# Altium PCB v1.4.PcbDoc
Units mil, origin at the board's own origin, x right, y up, seen from the top; angles counter-clockwise.
Board outline 2815 x 1660 mil, 2 copper layers (Top Layer, Bottom Layer); 43 components, 153 nets, 316 pads, 481 vias.
Unrouted connection lines stored in the file: 19.
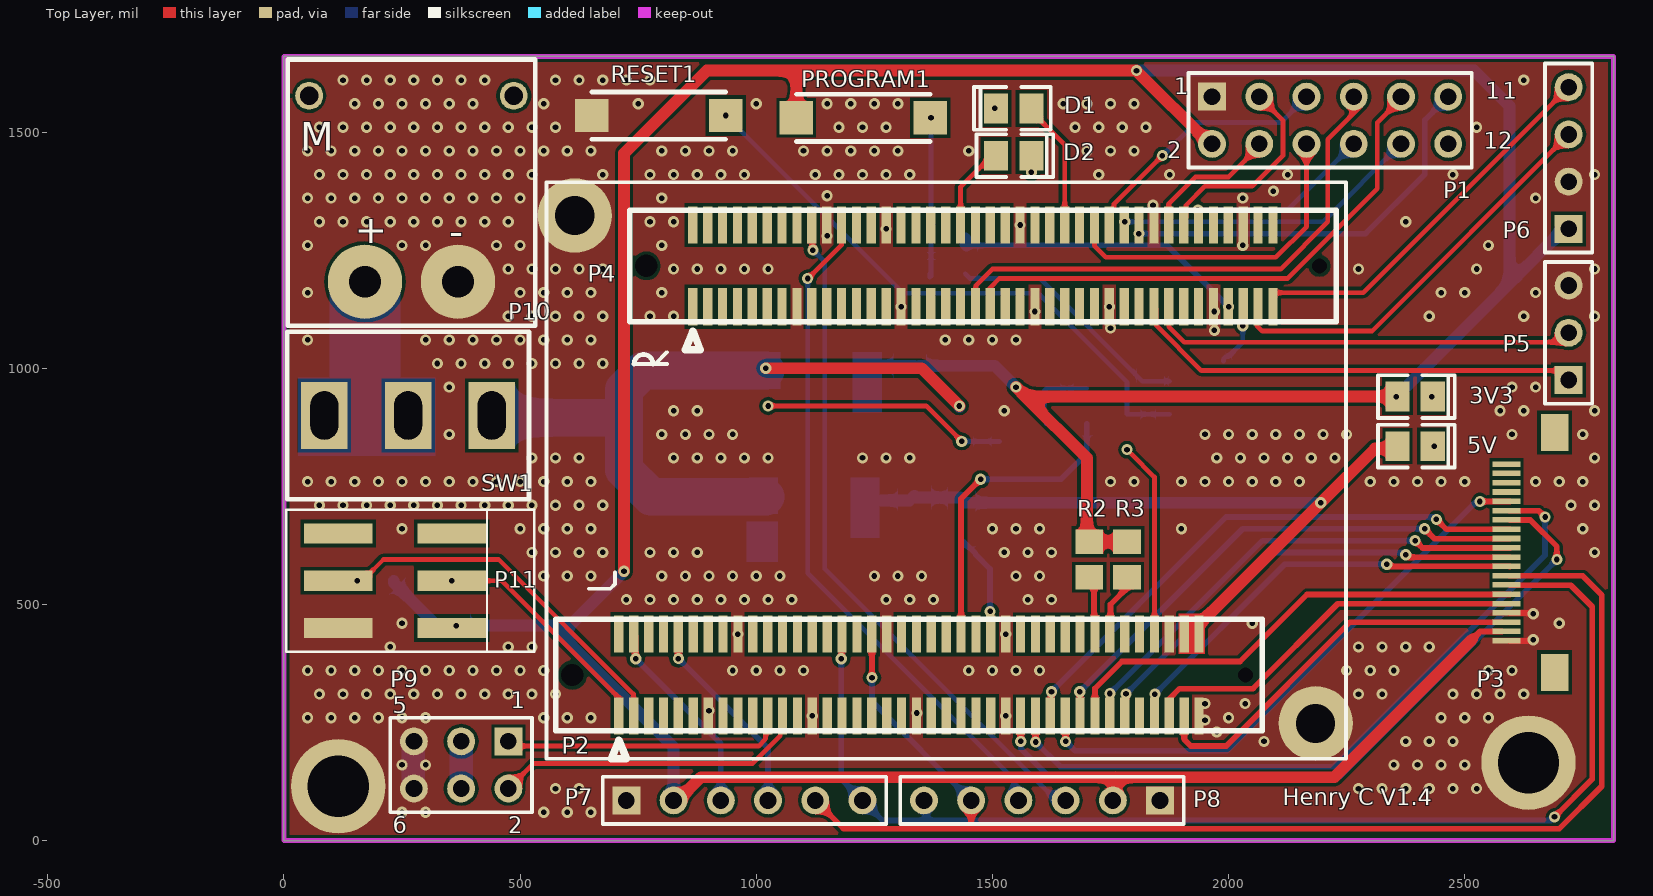
[diagram p0: Top Layer view]
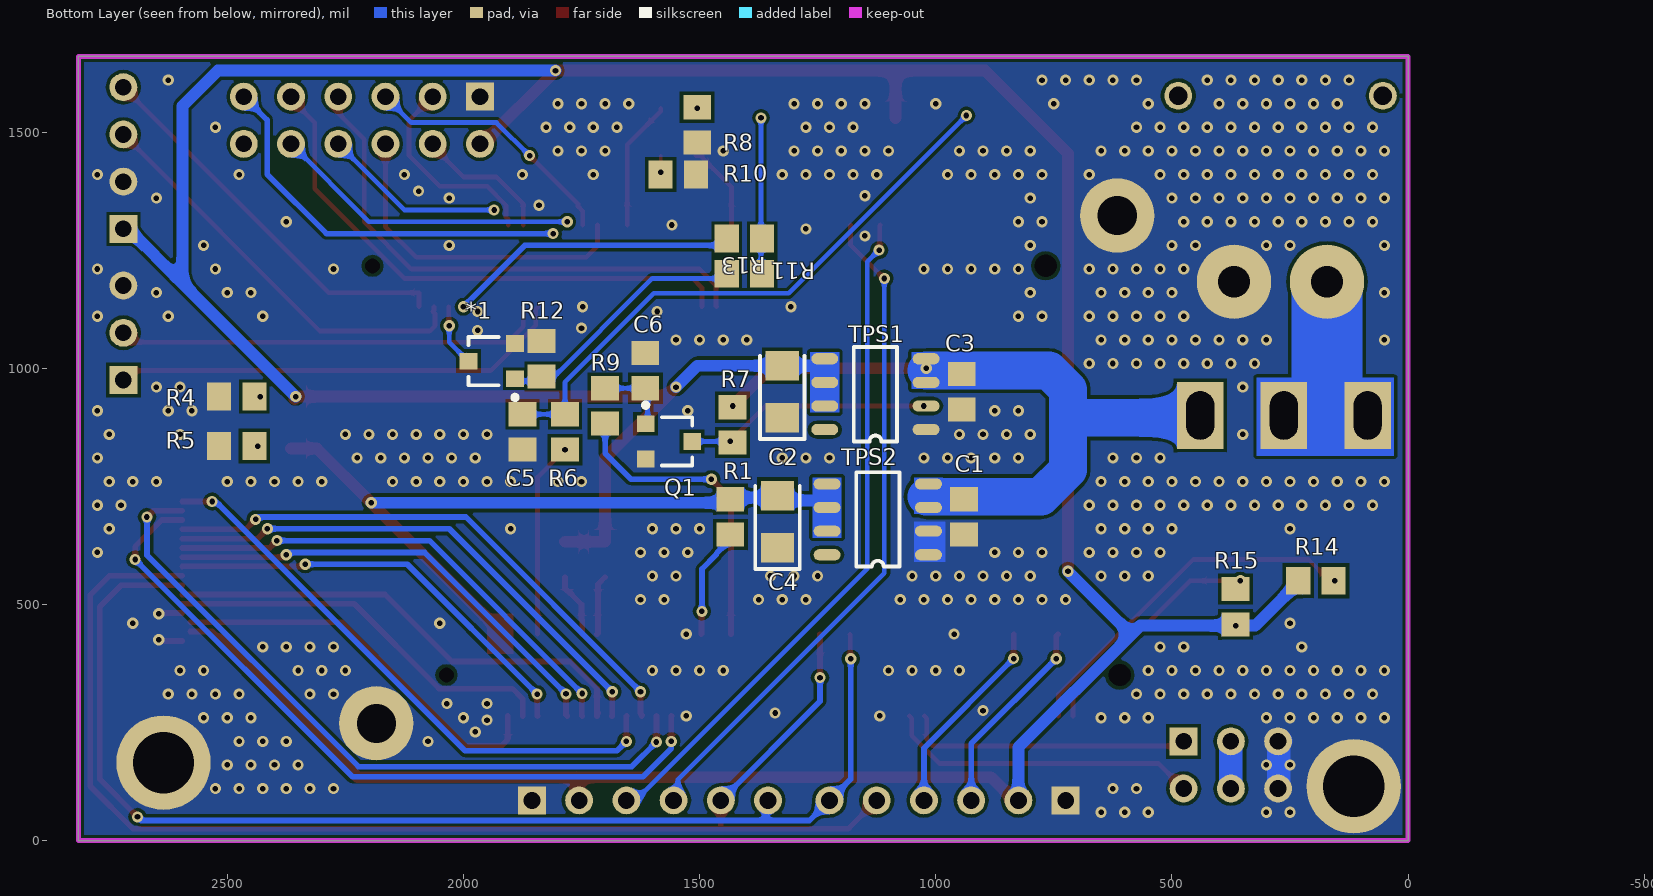
[diagram p1: Bottom Layer view, seen from below]
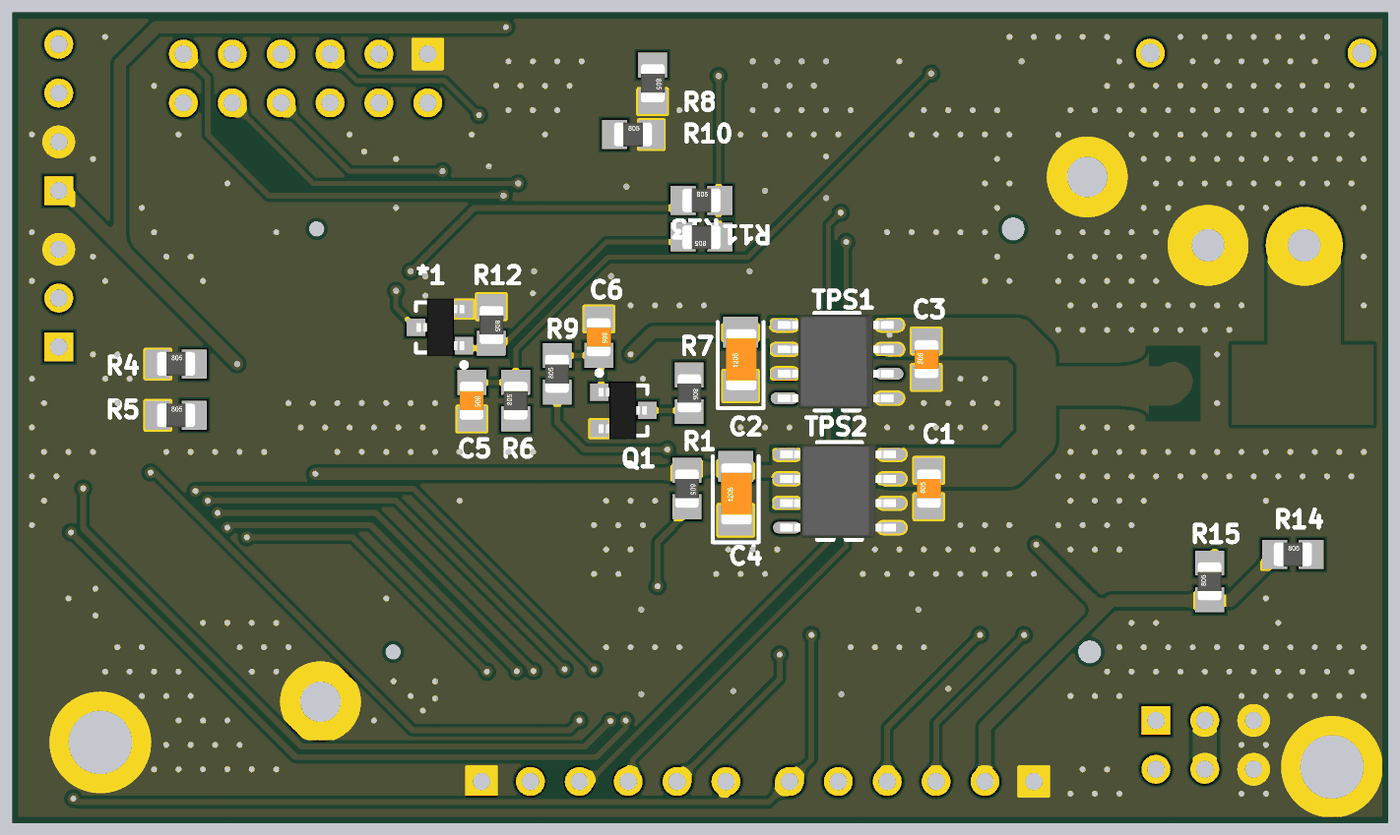
[diagram p2: 3D render of the assembled board from below, using the file's embedded part models]

## Layer stack, top to bottom
Top Solder: solder mask 0.4, Solder Resist, Dk 3.5
Top Layer: signal copper 1.4
Dielectric 1: dielectric 12.6, FR-4, Dk 4.8
Bottom Layer: signal copper 1.4
Bottom Solder: solder mask 0.4, Solder Resist, Dk 3.5

## Board outline
0,0 2815,0 2815,1660 0,1660

## Design rules (kind name [scope] priority, off if disabled: settings)
Clearance [All] p1: gap=7 ignorepadtopadclearanceinfootprint=FALSE
Height [All] p1: minheight=0 maxheight=2000 prefheight=1000
HoleSize [All] p1: absolutevalues=TRUE maxlimit=10000 minlimit=1 maxpercent=80.000 minpercent=20.000
MinimumSolderMaskSliver [All] p1: minsoldermaskwidth=5.91
PlaneConnect [All] p1: pad.planeconnectstyle=Relief pad.reliefexpansion=10 pad.reliefentries=4 pad.reliefconductorwidth=10 pad.reliefairgap=10 via.planeconnectstyle=Direct via.reliefexpansion=20 via.reliefentries=4 via.reliefconductorwidth=10 via.reliefairgap=10
PolygonConnect [All] p1: connectstyle=Direct reliefconductorwidth=10 reliefentries=4 polygonreliefangle="90 Angle" airgapwidth=10
RoutingVias [All] p1: holewidth=11.81 width=23.62 viastyle="Through Hole" minholewidth=11.81 minwidth=23.62 maxholewidth=10000 maxwidth=99999
SilkToSilkClearance [All] p1: silktosilkclearance=0
SilkToSolderMaskClearance [IsPad] p1: minsilkscreentomaskgap=5.91 clearancetoexposedcopper=TRUE
SolderMaskExpansion [All] p1: expansion=4 useseparateexpansions=TRUE expansionbottom=4
Width [All] p1: maxlimit=200 minlimit=6 preferedwidth=16
24 further rules are at their usual default settings.

## Classes and differential pairs
component class EVB1: 3V3 5V *1 C1 C2 C3 C4 C5 C6 D1 D2 P1 P2 P5 P6 P7 P8 P9 P10 PROGRAM1 Q1 R1 R2 R3 R4 R5 R6 R7 R8 R9 R10 R11 R12 R13 R14 R15 RESET1 SW1 TPS1 TPS2

## Components (designator, comment, footprint, x,y, rotation, side; value= is the part's Value field where it differs from the comment)
3V3 "LED" "LED 0805" 2395,940 r180 top (schematic designator 1)
5V "LED" "LED 0805" 2395,835 r180 top (schematic designator MCU1)
*1 "BC847B" SOT-23 1940,1015 r90 bottom
C1 "Cap Semi" CC2012-0805 940,685 r90 bottom value=100nF
C2 "Cap Semi" CC3216-1206 1325,950 r90 bottom value=220uF
C3 "Cap Semi" CC2012-0805 945,950 r90 bottom value=100nF
C4 "Cap Semi" CC3216-1206 1335,675 r90 bottom value=220uF
C5 "Cap Semi" CC2012-0805 1875,865 r270 bottom value=100nF
C6 "Cap Semi" CC2012-0805 1615,995 r270 bottom value=1uF
D1 "LED" "LED 0805" 1545,1550 r0 top
D2 "LED" "LED 0805" 1545,1450 r180 top
P1 "Header 6X2" HDR2X6 1965,1575 r0 top
P2 "LEFT" CON80 709.17,263.78 r180 top
P3 "Header 20" FPC0.5_20P 2720,610 r270 top
P4 "RIGHT" CON80 865.63,1130 r180 top
P5 "Header 3" HDR1X3 2720,975 r90 top
P6 "Header 4" HDR1X4 2720,1295 r90 top
P7 "Header 6" HDR1X6 725,85 r0 top
P8 "Header 6" HDR1X6 1855,85 r180 top
P9 "Header 3X2" HDR2X3 475,210 r180 top
P10 "Header 2" XT30PW-M 270,1380 r0 top
P11 "Header 3X2" "SMMD HEADER 2X3" 355,450 r270 top
PROGRAM1 "SW1" PUSHBUTTOM 1368.46,1530 r180 top
Q1 "BC847B" SOT-23 1565,845 r270 bottom
R1 "0R" CR2012-0805 1435,685 r270 bottom
R2 "4.7k" CR2012-0805 1705,595 r270 top
R3 "4.7k" CR2012-0805 1785,595 r270 top
R4 "Res" CR2012-0805 2480,940 r180 bottom value=6k2
R5 "Res" CR2012-0805 2480,835 r180 bottom value=6k2
R6 "Res" CR2012-0805 1785,865 r90 bottom value=1k
R7 "Res" CR2012-0805 1430,880 r270 bottom value=20k
R8 "Res" CR2012-0805 1505,1515 r270 bottom value=6k2
R9 "Res" CR2012-0805 1700,920 r90 bottom value=162k
R10 "Res" CR2012-0805 1545,1410 r180 bottom value=6k2
R11 "Res" CR2012-0805 1405,1200 r0 bottom value=10k
R12 "Res" CR2012-0805 1835,1020 r270 bottom value=10k
R13 "Res" CR2012-0805 1405,1275 r180 bottom value=1k
R14 "Res" CR2012-0805 195,550 r180 bottom value=10k
R15 "Res" CR2012-0805 365,495 r90 bottom value=10k
RESET1 "RESET" PUSHBUTTOM 651.54,1535 r0 top
SW1 "Toggle Switch" ToggleSwitch -386.77,1077.17 r270 top
TPS1 "TPS7333" TPS7333 1020.43,870 r0 bottom
TPS2 "TPS7350" TPS7333 1015.43,605 r0 bottom

## Footprints (in the part's own frame and the unit in brackets; to place one, negate y for a bottom-side part, rotate by r counter-clockwise, add the part's x,y. Pads: shape width x height; smd on the part's side, far side on the other; paste and mask are expansions set on the pad)
CC2012-0805 [mm] "Chip Capacitor; Body 2.0 x 1.2 mm (LxW typ)"
  rect 1.3x1.5 smd: 1(-0.95,0) 2(0.95,0)
  body extent -1,-0.63 1,0.61, height 0.78
CC3216-1206 [mm] "Chip Capacitor; Body 3.2 x 1.6 mm (LxW typ)"
  rect 1.6x1.8 smd: 1(-1.4,0) 2(1.4,0)
  silkscreen extent -2.54,-1.19 1.93,1.19, body extent -1.63,-0.84 1.57,0.76, height 1
CON80 [mm]
  rect 0.5x2 smd: 1(0,0) 2(0,-4.4) 3(-0.8,0) 4(-0.8,-4.4) 5(-1.6,0) 6(-1.6,-4.4) 7(-2.4,0) 8(-2.4,-4.4) 9(-3.2,0) 10(-3.2,-4.4) 11(-4,0) 12(-4,-4.4) 13(-4.8,0) 14(-4.8,-4.4) 15(-5.6,0) 16(-5.6,-4.4) 17(-6.4,0) 18(-6.4,-4.4) 19(-7.2,0) 20(-7.2,-4.4) 21(-8,0) 22(-8,-4.4) 23(-8.8,0) 24(-8.8,-4.4) 25(-9.6,0) 26(-9.6,-4.4) 27(-10.4,0) 28(-10.4,-4.4) 29(-11.2,0) 30(-11.2,-4.4) 31(-12,0) 32(-12,-4.4) 33(-12.8,0) 34(-12.8,-4.4) 35(-13.6,0) 36(-13.6,-4.4) 37(-14.4,0) 38(-14.4,-4.4) 39(-15.2,0) 40(-15.2,-4.4) 41(-16,0) 42(-16,-4.4) 43(-16.8,0) 44(-16.8,-4.4) 45(-17.6,0) 46(-17.6,-4.4) 47(-18.4,0) 48(-18.4,-4.4) 49(-19.2,0) 50(-19.2,-4.4) 51(-20,0) 52(-20,-4.4) 53(-20.8,0) 54(-20.8,-4.4) 55(-21.6,0) 56(-21.6,-4.4) 57(-22.4,0) 58(-22.4,-4.4) 59(-23.2,0) 60(-23.2,-4.4) 61(-24,0) 62(-24,-4.4) 63(-24.8,0) 64(-24.8,-4.4) 65(-25.6,0) 66(-25.6,-4.4) 67(-26.4,0) 68(-26.4,-4.4) 69(-27.2,0) 70(-27.2,-4.4) 71(-28,0) 72(-28,-4.4) 73(-28.8,0) 74(-28.8,-4.4) 75(-29.6,0) 76(-29.6,-4.4) 77(-30.4,0) 78(-30.4,-4.4) 79(-31.2,0) 80(-31.2,-4.4)
  round 0.5 hole 0.8 unplated: 81(-33.7,-2.2)
  round 1 hole 1.2 unplated: 82(2.5,-2.2)
  silkscreen extent -34.6,-5.2 3.4,2.3
CR2012-0805 [mm] "Chip Resistor; Body 2.0 x 1.3 mm (LxW typ)"
  rect 1.3x1.5 smd: 1(-0.95,0) 2(0.95,0)
  body extent -1,-0.61 1,0.63, height 0.78
FPC0.5_20P [mm] "0.5mm 20Pin FPC connector"
  rect 2x1.5 smd: 0(-6.45,-0.75) 0(6.45,-0.75)
  rect 0.3x1.5 smd: 1(4.75,-3.35) 2(4.25,-3.35) 3(3.75,-3.35) 4(3.25,-3.35) 5(2.75,-3.35) 6(2.25,-3.35) 7(1.75,-3.35) 8(1.25,-3.35) 9(0.75,-3.35) 10(0.25,-3.35) 11(-0.25,-3.35) 12(-0.75,-3.35) 13(-1.25,-3.35) 14(-1.75,-3.35) 15(-2.25,-3.35) 16(-2.75,-3.35) 17(-3.25,-3.35) 18(-3.75,-3.35) 19(-4.25,-3.35) 20(-4.75,-3.35)
HDR1X3 [mm] "Connector; Header; 3 Position"
  rect 1.5x1.5 hole 0.9: 1(0,0)
  round 1.5 hole 0.9: 2(2.54,0) 3(5.08,0)
  silkscreen extent -1.27,-1.27 6.35,1.27
HDR1X4 [mm] "Connector; Header; 4 Position"
  rect 1.5x1.5 hole 0.9: 1(0,0)
  round 1.5 hole 0.9: 2(2.54,0) 3(5.08,0) 4(7.62,0)
  silkscreen extent -1.27,-1.27 8.89,1.27
HDR1X6 [mm] "Connector; Header; 6 Position"
  rect 1.5x1.5 hole 0.9: 1(0,0)
  round 1.5 hole 0.9: 2(2.54,0) 3(5.08,0) 4(7.62,0) 5(10.16,0) 6(12.7,0)
  silkscreen extent -1.27,-1.27 13.97,1.27
HDR2X3 [mm] "Connector; Header; 2x3 Position"
  rect 1.5x1.5 hole 0.9: 1(-0.005,0)
  round 1.5 hole 0.9: 2(-0.005,2.54) 3(2.535,0) 4(2.535,2.54) 5(5.075,0) 6(5.075,2.54)
  silkscreen extent -1.27,-1.27 6.35,3.81
HDR2X6 [mm] "Connector; Header; 6x2 Position"
  rect 1.5x1.5 hole 0.9: 1(0,0)
  round 1.5 hole 0.9: 2(0,-2.54) 3(2.54,0) 4(2.54,-2.54) 5(5.08,0) 6(5.08,-2.54) 7(7.62,0) 8(7.62,-2.54) 9(10.16,0) 10(10.16,-2.54) 11(12.7,0) 12(12.7,-2.54)
  silkscreen extent -1.27,-3.81 13.97,1.27
"LED 0805" [mm] "0805 smd led"
  rect 1.3x1.6 smd: 1(0.95,0) 2(-0.95,0)
  silkscreen extent -2.13,-1.15 2,1.15, body extent -1.03,-0.53 1.03,0.38, height 0.85
PUSHBUTTOM [mm] "Normal size button"
  rect 1.8x1.8 smd: 1(7.2,0) 2(0,0)
  silkscreen extent 0,-1.27 7.2,1.27, body extent -1.57,-1.78 8.43,1.72, height 5
"SMMD HEADER 2X3" [mm]
  rect 1.1x3.68 smd: 1(0,-6.096) 2(0,0) 3(-2.54,-6.096) 4(-2.54,0) 5(-5.08,-6.096) 6(-5.08,0)
  silkscreen extent -6.35,-8.89 1.27,4.44
SOT-23 [mm]
  rect 0.9x0.95 smd: 1(-0.95,-1.25) 2(0.95,-1.25) 3(0,1.25)
  silkscreen extent -2.07,-1.37 1.3,1.25, body extent -1.5,-1.27 1.5,1.23, height 1.06
ToggleSwitch [mm] "Normal size toggle switch"
  rect 3.6x2.5 hole 1.5 slot 2.6 at 0 deg: 1(4.5,21) 2(4.5,16.5) 3(4.5,12)
  silkscreen extent 0,10 9,23, body extent 1.14,10.15 8,22.87, height 28.7
TPS7333 [mm]
  oval 1.45x0.6 smd: 1(0,0) 2(0,-1.27) 3(0,-2.54) 4(0,-3.81) 5(5.45,-3.81) 6(5.45,-2.54) 7(5.45,-1.27) 8(5.45,0)
  silkscreen extent 1.56,-4.44 3.89,0.64, body extent -0.22,-4.36 5.81,0.55, height 1.63
XT30PW-M [mm]
  round 1.5 hole 1: 0(-5.5,5) 0(5.5,5)
  round 4 hole 1.7: 1(-2.5,-5) 2(2.5,-5)
  silkscreen extent -6.65,-7.37 6.65,6.95

## Part data
3V3 5V D1 D2: "Typical GaAs LED", LatestRevisionDate=08-Jul-2005, LatestRevisionNote="Mech Layer 1 removed.", PackageReference=LED-1, Published=8-Jun-2000, Publisher="Altium Limited"
*1 Q1: "NPN"
C1 C2 C3 C4 C5 C6: "Capacitor (Semiconductor SIM Model)", LatestRevisionDate=17-Jul-2002, LatestRevisionNote="Re-released for DXP Platform.", PackageReference=C1206, Published=8-Jun-2000, Publisher="Altium Limited"
P1: "Header, 6-Pin, Dual row", LatestRevisionDate=17-Jul-2002, LatestRevisionNote="Re-released for DXP Platform.", Publisher="Altium Limited"
P2: library part Header40X2_left, "Header, 30-Pin, Dual row", LatestRevisionDate=17-Jul-2002, LatestRevisionNote="Re-released for DXP Platform.", Publisher="Altium Limited"
P3: "Header, 20-Pin", LatestRevisionDate=17-Jul-2002, LatestRevisionNote="Re-released for DXP Platform.", Publisher="Altium Limited"
P4: library part Header40X2_right, "Header, 30-Pin, Dual row", LatestRevisionDate=17-Jul-2002, LatestRevisionNote="Re-released for DXP Platform.", Publisher="Altium Limited"
P5: "Header, 3-Pin", LatestRevisionDate=17-Jul-2002, LatestRevisionNote="Re-released for DXP Platform.", Publisher="Altium Limited"
P6: "Header, 4-Pin", LatestRevisionDate=17-Jul-2002, LatestRevisionNote="Re-released for DXP Platform.", Publisher="Altium Limited"
P7 P8: "Header, 6-Pin", LatestRevisionDate=17-Jul-2002, LatestRevisionNote="Re-released for DXP Platform.", Publisher="Altium Limited"
P9 P11: "Header, 3-Pin, Dual row", LatestRevisionDate=17-Jul-2002, LatestRevisionNote="Re-released for DXP Platform.", Publisher="Altium Limited"
P10: "Header, 2-Pin", LatestRevisionDate=17-Jul-2002, LatestRevisionNote="Re-released for DXP Platform.", Publisher="Altium Limited"
PROGRAM1 RESET1: library part SW-SPST, "Single-Pole, Single-Throw Switch", Published=24-Mar-1999, Publisher="Altium Limited", Revision="July-2002: Re-released for DXP Platform."
R1 R2 R3: library part Res, "Resistor", LatestRevisionDate=4-Mar-2005, LatestRevisionNote="PCB Footprint replaced.", Published=8-Jun-2000, Publisher="Altium Limited"
R4 R5 R6 R7 R8 R9 R10 R11 R12 R13 R14 R15: "Resistor", LatestRevisionDate=4-Mar-2005, LatestRevisionNote="PCB Footprint replaced.", Published=8-Jun-2000, Publisher="Altium Limited"
SW1: library part ToggleSwitch, "Power toggle switch"
TPS2: library part TPS7333

## Free pads (board coordinates)
  round 157.48 hole 82.68: 1(615.74,1323.19) 1(2184.48,248.23)
  round 200 hole 129.92: 8(115,115) 8(2635,165)

## Via types
v1: diameter 23.62, hole 11.81, Top Layer to Bottom Layer, tented both sides, 481 vias

## Nets (pads, with @x,y where several pads share a name; then routed paths per layer and width w, separated by ;. In a path a pad name is that pad's centre, name@x,y a point inside that pad or via, vN(x,y) a via of type N, cw(c..) or ccw(c..) an arc to the next point about the centre after c; other vN are vias at no path point)
3V3: 3V3.1 C2.2 P1.2 P3.2 P6.1 P7.2 P8.2 P11.2 PROGRAM1.1 R2.1 R3.1 R14.1 R15.1 TPS1.5 TPS1.6 TPS1.7 | length 8689.1
  Top Layer w12: 2515,425 2532.58,442.58 2578.02,442.58 P3.2@2578.11,442.68
  Top Layer w25: v1(720,570) 720,1455 895,1630 1085,1630 ; P7.2 833.86,85 882.89,134.03 1760,134.03 ; PROGRAM1.1 1085,1630 ; v1(1550,960) 1570,940 ; P8.2 1750,85 1760,95 1760,134.03 ; R3.1 R2.1 1700,632.4 1700,810 1570,940 ; P1.2 1960,1475 v1(1805,1630) 1085,1630 ; v1(2355,940) 2355,939.65 3V3.1@2357.6,937.05 ; 3V3.1 3V3.1@2357.6,937.05 ; 2515,425 2224.03,134.03 1760,134.03 ; 1570,940 2351.69,940 2357.6,934.09 3V3.1@2357.6,937.05
  Bottom Layer w25: R14.1 232.4,546.06 323.46,455 v1(365,455) 567.12,455 586.06,436.06 ; v1(720,570) 586.06,436.06 ; P7.2 825,197.12 586.06,436.06 ; 1235,1005 1235.12,1005.12 C2.2 1334.88,1005.12 1340,1000 1345,1005 1505,1005 v1(1550,960) ; v1(1805,1630) 2520,1630 2595,1555 2595,1180 ; v1(2355,940) 2595,1180 ; P6.1@2719.76,1294.76 2709.76,1294.76 2595,1180
3V3_ENABLE: Q1.3 R7.2 TPS1.2 | length 527.8
  Top Layer w10: v1(1025,920) 1360,920 v1(1435,845)
  Bottom Layer w10: R7.2 1432.6,842.6 v1(1435,845) Q1.3
8V: C1.2 C3.2 R7.1 SW1.1 TPS1.3 TPS1.4 TPS2.3 TPS2.4 | length 1544.7
  Top Layer w25: v1(1020,1000) 1350,1000 v1(1430,920)
  Bottom Layer w15: SW1.1 440,904.21 SW1.1@440,905
  Bottom Layer w25: R7.1 v1(1430,920)
  Bottom Layer w80: SW1.1@440,904.21 449.21,895 720,895 ; 1020,728 777,728 720,785 720,895 ; v1@1020,995 760,995 720,955 720,895
A2_SEMC_CKE: P4.2
A3_SEMC_A12: P4.6
A4_SEMC_A8: P4.10
A5_SEMC_A7: P4.12
A6_SEMC_A4: P4.16
A7_ENET_MDC: P4.24
A8_LCDIF_DATA02: P4.34
A9_LCDIF_DATA03: P4.36
A10_LCDIF_DATA07/BT_CFG_7: P4.44
A11_LCDIF_DATA12: P1.6 P4.56 | length 709.2
  Top Layer w10: P4.56 1716.02,1258.98 1740,1235 2100,1235 2165,1300 2165,1465 2170,1470 P1.6
A12_ENET_TX_D1: P4.31
A13_ENET_TX_EN: P4.35
B1_SEMC_A6: P4.5
B2_SEMC_A9: P4.1
B3_SEMC_CLK: P4.4
B4_SEMC_A11: P4.8
B6_SEMC_A5: P4.14
B7_SEMC_DQS: P4.22 P8.4 | length 1440.6
  Top Layer w10: v1(1108.75,1190) 1110,1190 1180.3,1260.3 1180.3,1302.93 P4.22 ; P8.4@1535,80 P8.4@1540,85
  Bottom Layer w10: v1(1108.75,1190) 1108.75,566.25 1545.61,129.39 1545.61,94.39 P8.4
B8_LCDIF_DATA01: P4.32
B9_LCDIF_DATA04: D2.1 P4.38 | length 212.5
  Top Layer w10: P4.38 1432.56,1384.05 1512.6,1464.09 D2.1@1512.6,1470 ; D2.1@1495,1450 D2.1
B11_LCDIF_DATA13: P1.5 P4.58 | length 555.4
  Top Layer w10: P4.58 1747.52,1332.76 1757.17,1342.41 1757.17,1347.57 1859.6,1450 v1(1860,1450) ; P1.5@2165,1570 P1.5
  Bottom Layer w10: v1(1860,1450) 1930,1520 2110,1520 P1.5
B12_ENET_TX_D0: P4.33
B13_ENET_TX_CLK: P4.45
B14_LCD_PWM: P4.49
BOOT_MODE0: P4.73 R13.1 | length 624.9
  Bottom Layer w12: R13.1@1445,1260 1870,1260 v1(2000,1130)
  Bottom Layer w25: R13.1 1442.4,1262.6 R13.1@1445,1260
BOOT_MODE1: *1.3 P4.75 | length 135.3
  Top Layer w10: v1(2030,1090) 2030.98,1090.98 P4.75
  Bottom Layer w10: *1.3 1989.21,1019.21 1995,1025 2000.2,1025 2030,1054.8 v1(2030,1090)
C1_SEMC_BA0: P4.25
C2_SEMC_A0: P4.3
C3_SEMC_D14: P2.8
C4_SEMC_D11: P2.6
C5_SEMC_D9: P2.4 P7.3 | length 442.5
  Top Layer w12: P2.4 745,432.67 v1(745,385) ; P7.3@915,75 P7.3
  Bottom Layer w12: v1(745,385) 925,205 P7.3
C6_SEMC_D8: P2.2
C7_ENET_MDIO: P4.26
C8_LCDIF_DATA00: P4.30
C9_LCDIF_DATA05: P4.40
C10_LCDIF_DATA08: P4.48
C11_LCDIF_DATA14: P1.10 P4.60 | length 658.3
  Top Layer w10: P1.10@2365,1470 P1.10
  Bottom Layer w10: v1(1780,1310) 2170,1310 2200,1310 P1.10
C12_ENET_CRS: P1.7 P4.39 | length 1141.9
  Top Layer w10: P4.39 1465,1130.95 1465,1175 1500,1210 2110,1210 2210,1310 2210,1485 2274.39,1549.39 2274.39,1565.61 P1.7
C13_ENET_RX_ER: P4.37
C14_LCD_TPINT: P4.51
D1_SEMC_WE: P4.23
D2_SEMC_RAS: P4.21
D3_SEMC_CAS: P4.27
D4_SEMC_D12: P2.12
D5_SEMC_D10: P2.10 P7.4 | length 430.6
  Top Layer w12: v1(835.15,385.15) P2.10
  Bottom Layer w12: v1(835.15,385.15) 1025,195.3 P7.4
D6_SEMC_DM1: P4.18 P8.3 | length 1452.5
  Top Layer w10: P4.18 1118.8,1302.03 1118.8,1251.2 v1(1120,1250)
  Bottom Layer w10: v1(1120,1250) 1145,1225 1145,575 1635,85 P8.3
D7_LCDIF_CLK: P4.72
D8_LCDIF_VSYNC: P1.3 P4.68 | length 443
  Top Layer w10: P4.68 1905,1315 1909.84,1319.84 1909.84,1344.84 1950,1385 2050,1385 2115,1450 2115,1525 P1.3 P1.3@2060,1575
D9_LCDIF_DATA06/BT_CFG_6: P4.42
D10_LCDIF_DATA09: P4.50
D11_LCDIF_DATA15: P1.11 P4.62 | length 866.3
  Top Layer w12: P1.11@2455,1565 P1.11
  Bottom Layer w12: v1(1810,1285) 2290,1285 2415.5,1410.5 2415.5,1525.5 2449.63,1559.63 2450.37,1559.63 2455,1555 2465,1565 P1.11
D12_ENET_RX_D1: P4.43
D13_SD1_CD: P4.53
D14_WDOG1_B: P4.55
E1_SEMC_CS0: P4.19
E3_SEMC_D0: P2.20
E4_SEMC_D15: P2.16
E5_SEMC_D13: P2.14
E7_LCDIF_ENABLE: P1.8 P4.70 | length 388
  Bottom Layer w10: v1(1935,1335) 2125,1335 P1.8
E8_LCDIF_HSYNC: P1.4 P4.66 | length 292.1
  Top Layer w10: P4.66 1873.5,1348.5 1930,1405 2000,1405 2065,1470 P1.4
E10_LCDIF_DATA10: D1.1 P4.52 | length 276
  Top Layer w10: D1.1 1582.4,1544.09 1653.03,1473.46 P4.52
E11_LCDIF_DATA11: P4.54
E12_ENET_RX_D0: P1.9 P4.41 | length 1162.9
  Top Layer w10: P4.41 1495,1130.55 1495,1170 1515,1190 2125,1190 2315,1380 2315,1520 2365,1570 P1.9
E14_JTAG_TMS/SWD_DIO: P4.63 P5.1 | length 996.7
  Top Layer w10: P4.63 1846.85,1125.16 1846.85,1090.47 1942.32,995 2700,995 P5.1 ; P5.1 2720,965 2725,960 2725,970 P5.1
Encoder_A: P2.3 P11.3 R14.2 | length 767.1
  Top Layer w10: P11.3@160.79,545 210.79,595 455,595 740,310 740,264.44 P2.3
  Bottom Layer w10: v1(155,550) R14.2
Encoder_B: P2.1 P11.4 R15.2 | length 495.3
  Top Layer w10: v1(355,550) 461.51,550 709.17,302.34 P2.1
F1_SEMC_BA1: P4.17
F2_SEMC_D4: P2.24
F3_SEMC_D1: P2.26
F4_SEMC_D2: P2.22
F12_JTAG_TCK/SWD_CLK: P4.65 P5.2 | length 917.6
  Top Layer w10: P4.65 1873.5,1087.86 1906.36,1055 2700,1055 P5.2 P5.2@2725,1070
F13_SAI2_RXD: P4.67
F14_SAI2_TXD: P4.61
FLEXPWM1_PWM3_B: P2.23 P9.2 | length 668.7
  Top Layer w10: P9.2 480,110 485,115 485,119.81 528.5,163.32 992.36,163.32 1050.78,221.74 1050.78,258.94 P2.23
FLEXPWM2_PWM3_B: P2.21 P9.1 | length 612.9
  Top Layer w10: P9.1 485,210 490,215 490,209.72 499.72,200 1005,200 1019.29,214.29 1019.29,258.94 P2.21
G1_SEMC_A1: P4.9
G2_SEMC_A10: P4.11
G3_SEMC_A2: P4.7
G4_SEMC_D3: P2.28
G5_SEMC_D5: P2.30
G10_JTAG_nTRST: P4.59
G11_LPUART6_RX: P4.77 P6.3 | length 880.3
  Top Layer w10: P4.77 2062.48,1122.52 2065,1120 2060,1115 2060,1090 2071.37,1078.63 2303.63,1078.63 P6.3
G12_CSI_D3/ROW0: P2.57 P3.15 | length 1502.3
  Top Layer w12: P2.57 1591.35,263.49 v1(1591.35,208.65) ; P3.15@2595,698.11 2656.89,698.11 v1(2670,685)
  Bottom Layer w12: v1(1591.35,208.65) 1643.51,156.49 2222.48,156.49 2670,604.01 v1(2670,685)
G13_SAI2_MCLK: P4.69
GND: *1.2 C1.1 C2.1 C3.1 C4.1 C5.2 C6.1 P1.1 P2.13 P2.18 P2.27 P2.38 P2.41 P2.53 P2.54 P2.76 P2.79 P3.1 P3.4 P4.15 P4.20 P4.28 P4.29 P4.46 P4.47 P4.57 P4.64 P4.71 P4.76 P5.3 P6.2 P7.1 P8.1 P9.5 P9.6 P10.2 P11.1 pad.1 pad.8 Q1.2 R4.1 R5.1 R8.2 R10.2 R12.1 RESET1.2 TPS1.1 TPS2.1 TPS2.2 | length 216.1
  Top Layer w12: P3.1@2595.01,422.53 2642.53,422.53 v1(2645,425) ; P3.4@2595,481.57 2643.43,481.57 v1(2645,480)
  Bottom Layer w25: P9.5@265,215 270,210 P9.5
  Bottom Layer w50: P9.5@270,210 273.46,206.54 273.46,111.73 P9.6
  other v1: 250,60 300,60 550,60 600,60 650,60 575,110 625,110 2275,110 2325,110 2375,110 2425,110 2475,110 2525,110 250,160 300,160 2350,160 2400,160 2450,160 2500,160 2075,210 2375,210 2425,210 2475,210 1975,230 1950,255 50,260 100,260 150,260 200,260 250,260 300,260 550,260 600,260 650,260 2000,260 2450,260 2500,260 2550,260 1118.62,263.78 1528.07,263.78 1340,270 900,275 1950,290 2035,290 75,310 125,310 175,310 225,310 275,310 325,310 375,310 425,310 475,310 525,310 575,310 2275,310 2325,310 2475,310 2525,310 2575,310 2625,310 50,360 100,360 150,360 200,360 250,360 300,360 350,360 400,360 450,360 500,360 550,360 950,360 1000,360 1050,360 1100,360 1450,360 1500,360 1550,360 1600,360 2250,360 2300,360 2350,360 2550,360 2600,360 225,410 475,410 525,410 2275,410 2325,410 2375,410 2425,410 961.14,437.01 1528.07,437.01 250,460 2050,460 2700,460 725,510 775,510 825,510 875,510 925,510 975,510 1025,510 1075,510 1275,510 1325,510 1375,510 1575,510 1625,510 550,560 600,560 650,560 800,560 850,560 900,560 950,560 1000,560 1050,560 1250,560 1300,560 1350,560 1550,560 1600,560 525,610 575,610 625,610 675,610 775,610 825,610 875,610 1525,610 1575,610 1625,610 2775,610 250,660 500,660 550,660 600,660 650,660 1500,660 1550,660 1600,660 1900,660 2750,660 75,710 125,710 175,710 225,710 275,710 325,710 375,710 425,710 475,710 525,710 575,710 625,710 675,710 2725,710 2775,710 50,760 100,760 150,760 200,760 250,760 300,760 350,760 400,760 450,760 500,760 550,760 600,760 650,760 1750,760 1800,760 1900,760 1950,760 2000,760 2050,760 2100,760 2150,760 2300,760 2350,760 2400,760 2450,760 2500,760 2650,760 2700,760 2750,760 525,810 575,810 625,810 825,810 875,810 925,810 975,810 1025,810 1225,810 1275,810 1325,810 1975,810 2025,810 2075,810 2125,810 2175,810 2225,810 2775,810 350,860 800,860 850,860 900,860 950,860 1950,860 2000,860 2050,860 2100,860 2150,860 2200,860 2250,860 2600,860 2750,860 825,910 875,910 1525,910 2575,910 2625,910 2775,910 350,960 2600,960 2650,960 325,1010 375,1010 425,1010 475,1010 525,1010 575,1010 625,1010 675,1010 50,1060 300,1060 350,1060 400,1060 450,1060 500,1060 550,1060 600,1060 650,1060 1400,1060 1450,1060 1500,1060 1550,1060 1970,1080 1750,1085 475,1110 525,1110 575,1110 625,1110 675,1110 775,1110 825,1110 2425,1110 2625,1110 2775,1110 1590,1120 1970,1120 1306.57,1130 1747.52,1130 50,1160 500,1160 550,1160 600,1160 650,1160 800,1160 2450,1160 2500,1160 2650,1160 475,1210 525,1210 575,1210 625,1210 675,1210 825,1210 875,1210 925,1210 975,1210 1025,1210 2275,1210 2525,1210 2775,1210 50,1260 250,1260 300,1260 450,1260 500,1260 800,1260 2030,1260 2550,1260 1150,1280 1275,1295 1558.54,1303.23 75,1310 125,1310 175,1310 225,1310 275,1310 325,1310 375,1310 425,1310 475,1310 775,1310 825,1310 2375,1310 1840,1345 50,1360 100,1360 150,1360 200,1360 250,1360 300,1360 350,1360 400,1360 450,1360 500,1360 800,1360 2030,1360 2650,1360 1150,1365 2095,1375 75,1410 125,1410 175,1410 225,1410 275,1410 325,1410 375,1410 425,1410 475,1410 525,1410 675,1410 775,1410 825,1410 875,1410 925,1410 975,1410 1125,1410 1175,1410 1225,1410 1275,1410 1325,1410 1725,1410 1875,1410 2125,1410 2475,1410 2775,1410 50,1460 100,1460 150,1460 200,1460 250,1460 300,1460 350,1460 400,1460 450,1460 500,1460 550,1460 600,1460 650,1460 800,1460 850,1460 900,1460 950,1460 1100,1460 1150,1460 1200,1460 1250,1460 1300,1460 1450,1460 1700,1460 1750,1460 1800,1460 75,1510 125,1510 175,1510 225,1510 275,1510 325,1510 375,1510 425,1510 475,1510 525,1510 575,1510 1175,1510 1225,1510 1275,1510 1675,1510 1725,1510 1775,1510 1825,1510 2525,1510 150,1560 200,1560 250,1560 300,1560 350,1560 400,1560 550,1560 750,1560 1000,1560 1150,1560 1200,1560 1250,1560 1300,1560 1650,1560 1700,1560 1750,1560 1800,1560 125,1610 175,1610 225,1610 275,1610 325,1610 375,1610 425,1610 575,1610 625,1610 675,1610 725,1610 775,1610 2625,1610
H1_SEMC_A3: P4.13
H2_SD1_D2: P2.11
H3_SEMC_DM0: P2.34
H4_SEMC_D7: P2.32 P3.7 P7.6 P8.6 | length 2585.8
  Top Layer w10: v1(1180,385) 1180.8,385.8 1180.8,436.2 P2.32
  Top Layer w12: P8.6 1360,85 P8.6@1365,80 ; P3.7@2595,540.63 2724.37,540.63 2770,495 2770,130 v1(2690,50)
  Bottom Layer w12: v1(1180,385) 1180,130 P7.6 1267.53,42.47 1360,42.47 ; P8.6 1355,70 1360,65 1360,42.47 ; v1(2690,50) 2682.47,42.47 1360,42.47
H5_SEMC_D6: P2.36 P3.8 P7.5 P8.5 | length 2837.9
  Top Layer w12: P7.5 1184.81,25.19 2700.28,25.19 2790,114.91 2790,520 2749.68,560.32 P3.8@2595,560.32 ; P2.36 1245,436.61 v1(1245,345) ; 1455,30 P8.5
  Bottom Layer w12: v1(1245,345) 1245,295 P8.5
H10_USB_OTG1_ID: P2.51
H11_CSI_D4/COL1: P2.55 P3.14 | length 1570
  Top Layer w12: P2.55 1559.78,263.56 1559.78,210.22 v1(1560,210) ; P3.14@2595,678.43 2595.09,678.52 2638.82,678.52 2695,622.34 v1(2695,595)
  Bottom Layer w12: v1(1560,210) 1560,195 1620,135 2235,135 v1(2695,595)
H12_CSI_D5/ROW1: P2.59 P3.13 | length 1187.3
  Top Layer w12: P2.59 1621.28,265.06 1625,268.78 v1(1625,315) ; v1(2440,680) 2461.26,658.74 P3.13@2595,658.74
  Bottom Layer w12: v1(1625,315) 1994.81,684.81 2435.19,684.81 v1(2440,680)
H13_CSI_D9/ROW3: P2.73 P3.9 | length 914
  Top Layer w12: P2.73 1844.01,264.77 v1(1844.01,310) ; v1(2335,585) 2339.81,580.19 2385.28,580.19 2385.77,580.69 2594.31,580.69 P3.9@2595,580
  Bottom Layer w12: v1(1844.01,310) 2119.01,585 v1(2335,585)
H14_CAN2_TX/ADC: P2.58
J2_SD1_D3: P2.9
J3_SD1_CLK0/SPI1_CS0: P2.5
J4_SD1_CMD/SPI1_SCLK: P2.7
J11_I2C1_SCL: P2.68 R3.2 | length 135.7
  Top Layer w12: P2.68 1748.54,466.54 1750,468 1750,500 1785,535 R3.2
J12_CSI_VSYNC: P2.77 P3.3 | length 836.4
  Top Layer w12: P2.77 1906.02,213.98 1920,200 1995,200 2257.36,462.36 P3.3@2578.11,462.36
J13_CSI_D6/COL2: P2.63 P3.12 | length 1113
  Top Layer w12: v1(1685,315) 1685,264.33 P2.63 ; v1(2415,660) 2435.94,639.06 P3.12@2595,639.06
  Bottom Layer w12: v1(1685,315) 2030,660 v1(2415,660)
J14_CSI_D2/COL0: P2.61 P3.16 | length 1221.1
  Top Layer w12: P2.61 1655,262.83 v1(1655,210) ; v1(2532.2,717.8) P3.16@2595,717.8
  Bottom Layer w12: v1(1655,210) 1675,190 1996.51,190 2524.31,717.8 v1(2532.2,717.8)
K7_ON_REQ: P2.48 R9.1 | length 655.5
  Top Layer w12: P2.48 1433.58,723.58 v1(1475,765)
  Bottom Layer w12: v1(1475,765) 1645,765 1700,820 R9.1
K10_CSI_HSYNC: P2.75 P3.5 | length 840
  Top Layer w12: P2.75 1874.52,299.88 1896.29,321.65 2051.65,321.65 2231.26,501.26 P3.5@2595,501.26
K11_I2C1_SDA: P2.66 R2.2 | length 127.7
  Top Layer w12: R2.2@1700,557.6 1715,542.6 1715,439.05 P2.66
K12_CSI_MCLK: P2.71
K14_UART1_TXD: P4.78
L3_FlexSPI__A_SS0: P2.29
L4_FlexSPI_A_CLK: P2.31
L6_WAKEUP: P2.40
L7_PERI_PWREN: P2.44
L10_CAN2_RX: P2.56
L11_UART2_TXD: P2.62
L12_CSI_PIXCLK: P2.65 P3.6 | length 1020.4
  Top Layer w12: P2.65 1717.04,267.96 1715,270 1717.04,272.04 1717.04,322.13 1774.05,379.14 2024.14,379.14 2165.94,520.94 2578.11,520.94 P3.6@2595,520.94
L13_CSI_D7/ROW2: P2.67 P3.11 | length 1035
  Top Layer w12: P2.67 1749.26,264.5 1749.26,310.74 v1(1748.73,311.27) ; v1(2395,635) 2410.63,619.37 P3.11@2595,619.37
  Bottom Layer w12: v1(1748.73,311.27) 1748.73,311.59 2072.14,635 v1(2395,635)
LPUART6_TX: P4.79 P6.4 | length 836.2
  Top Layer w10: P4.79 2093.98,1160 2285,1160 P6.4
M3_FlexSPI_D1_B: P2.19
M5_FlexSPI_D2_B: P2.25
M6_ONOFF: P2.42
M7_POR_B: P2.46
M9_VDD_SNVS_IN: P4.74
M12_UART2_RXD: P2.60
M13_CSI_D8/COL3: P2.69 P3.10 | length 995.9
  Top Layer w12: P2.69 1782.78,266.52 v1(1782.78,310.55) ; v1(2375,605) 2380.31,599.69 P3.10@2595,599.69 ; v1(1782.78,310.55) 1782.78,308.33 1785,310.55 v1(1782.78,310.55)
  Bottom Layer w12: v1(1782.78,310.55) 2082.03,609.81 2370.19,609.81 v1(2375,605)
M14_CSI_PWDN: P2.64
MCU_5V: 5V.1 C4.2 P2.78 P2.80 R1.1 TPS2.5 TPS2.6 TPS2.7 | length 1582
  Top Layer w25: 1920,440 v1(2195,715) 2310,830 5V.1@2365,830
  Bottom Layer w25: 1230,720 1324.88,720 C4.2 1338.86,726.26 1431.14,726.26 R1.1 1442.4,715 v1(2195,715)
N3_FlexSPI__B_SS0: P2.17
N4_FlexSPI_D1_A: P2.35
N6_OTG1_VBUS: P2.50
N13_CLK1_OUT_P: P2.72
Net1_2: 3V3.2 R4.2 | length 2.4
  Top Layer w10: v1(2430,940) 3V3.2
Net*1_1: *1.1 R11.2 R12.2 | length 526.8
  Bottom Layer w10: R11.2 1452.4,1190 1600,1190 1817.4,972.6 *1.1@1875,972.6
NetC5_1: C5.1 R6.2 RESET1.1 | length 1241.6
  Bottom Layer w10: v1(935,1535) 1311.53,1158.47 1596.53,1158.47 1785,970 R6.2 C5.1
NetC6_2: C6.2 Q1.1 R9.2 | length 164.1
  Bottom Layer w10: Q1.1 1614.21,890.79 1610,895 1610,952.6 C6.2 1699.8,957.6 R9.2
NetD1_2: D1.2 R8.1 | length 2.6
  Top Layer w10: v1(1505,1550) D1.2
NetD2_2: D2.2 R10.1 | length 35
  Top Layer w7: v1(1582.4,1415) D2.2
NetMCU1_2: 5V.2 R5.2
  other v1: 2435,835
NetP10_1: P10.1 SW1.2 SW1.3 | length 288.8
  Bottom Layer w150: 170,895 171.57,896.57 P10.1
NetPROGRAM1_2: PROGRAM1.2 R11.1 R13.2 | length 347.7
  Top Layer w10: PROGRAM1.2 v1(1370,1530)
  Bottom Layer w10: R11.1 1367.6,1192.4 1370,1194.8 1370,1200 1370,1290 v1(1370,1530)
P2_FlexSPI_CLK_B: P2.15
P3_FlexSPI_D0_A: P2.33
P4_FlexSPI_D2_A: P2.37
P5_FlexSPI_D3_A: P2.39
P6_OTG2_VBUS: P2.52 R1.2 | length 223.4
  Top Layer w12: v1(1495,485) 1495.79,484.21 1495.79,437.79 P2.52
  Bottom Layer w12: R1.2@1435,632.6 1438.94,632.6 1465,606.54 1465,605 1495,575 v1(1495,485)
P13_CLK1_OUT_N: P2.70
POR_BUTTON: P2.74 R6.1 | length 402.2
  Top Layer w10: 1793.8,818.8 1843.03,769.57 P2.74
  other v1: 1785,827.6
SERVO_6V: P9.3 P9.4 | length 100
  Bottom Layer w50: P9.4 P9.3
USB2_N: P2.43
USB2_P: P2.45
USB_OTG_N: P2.47
USB_OTG_P: P2.49
pads on no net: P1.12 P2.81 P2.82 P3.0 P3.17 P3.18 P3.19 P3.20 P4.80 P4.81 P4.82 P10.0 P11.5 P11.6 TPS1.8 TPS2.8

## Polygon pours and split planes (outlines as drawn)
GND on Bottom Layer "Bottom Layer-GND" (solid, remove dead copper, pour order 14): 0,1660 0,0 2815,0 2815,1660
GND on Top Layer "Top Layer-GND" (solid, remove dead copper, pour order 16): 0,1660 0,0 2815,0 2815,1660

## Keep-outs
Keep-Out Layer:
  the board outline again, w10

## Other copper
Top Layer:
  region net MCU_5V: 1895,480 1950,480 1950,395 1895,395
  region net GND: 1647.17,395.15
  region: -435,1005
Bottom Layer:
  region net NetP10_1: 30,980 320,980 320,815 30,815
  region net 3V3: 1204.71,906.44 1265.29,906.44 1265.29,1033.56 1204.71,1033.56
  region net MCU_5V: 1199.71,641.44 1260.29,641.44 1260.29,768.56 1199.71,768.56
  region net 8V: 985.14,691.44 1045.73,691.44 1045.73,768.56 985.14,768.56
  region net 8V: 990.14,956.44 1050.73,956.44 1050.73,1033.56 990.14,1033.56
  region net GND: 980,590 1045,590 1045,675 980,675
  region net GND: 1204.71,906.44
  region net 8V: 1020,728
  region net GND: 1056.34,970

## Silkscreen, mask and mechanical layers (free items; w line width, h text height)
Top Overlay:
  lines w7.87: 645.74,533.23 690.74,533.23 700.74,543.23 700.74,568.23 ; 741.29,1009.06 811.29,1009.06 ; 811.29,1034.06 786.29,1009.06 ; 786.29,1009.06 781.29,1009.06 786.29,1009.06 ; 555.74,173.23 2248.66,173.23 2248.66,1393.7 555.74,1393.7 555.74,173.23
  lines w10: 741.29,1009.06 cw(c761.29,1009.06) 781.29,1009.06
  text "Henry C V1.4" at 2115,75 h35

## Text inside footprints (layer, text, board x,y; h text height)
P1: Top Overlay "2" at 1870,1445 h35; Top Overlay "1" at 1885,1580 h35; Top Overlay "1" at 2545,1570 h35; Top Overlay "1" at 2580,1570 h35; Top Overlay "12" at 2540,1465 h35
P9: Top Overlay "1" at 480.19,280 h35; Top Overlay "2" at 475.19,15 h35; Top Overlay "5" at 230.19,270 h35; Top Overlay "6" at 230,15 h35
P10: Top Overlay "+" at 150,1265 h60; Top Overlay "-" at 350,1260 h60; Top Overlay "M" at 35,1460 h60